# EAGLE board motherboard (EAGLE 5.06)
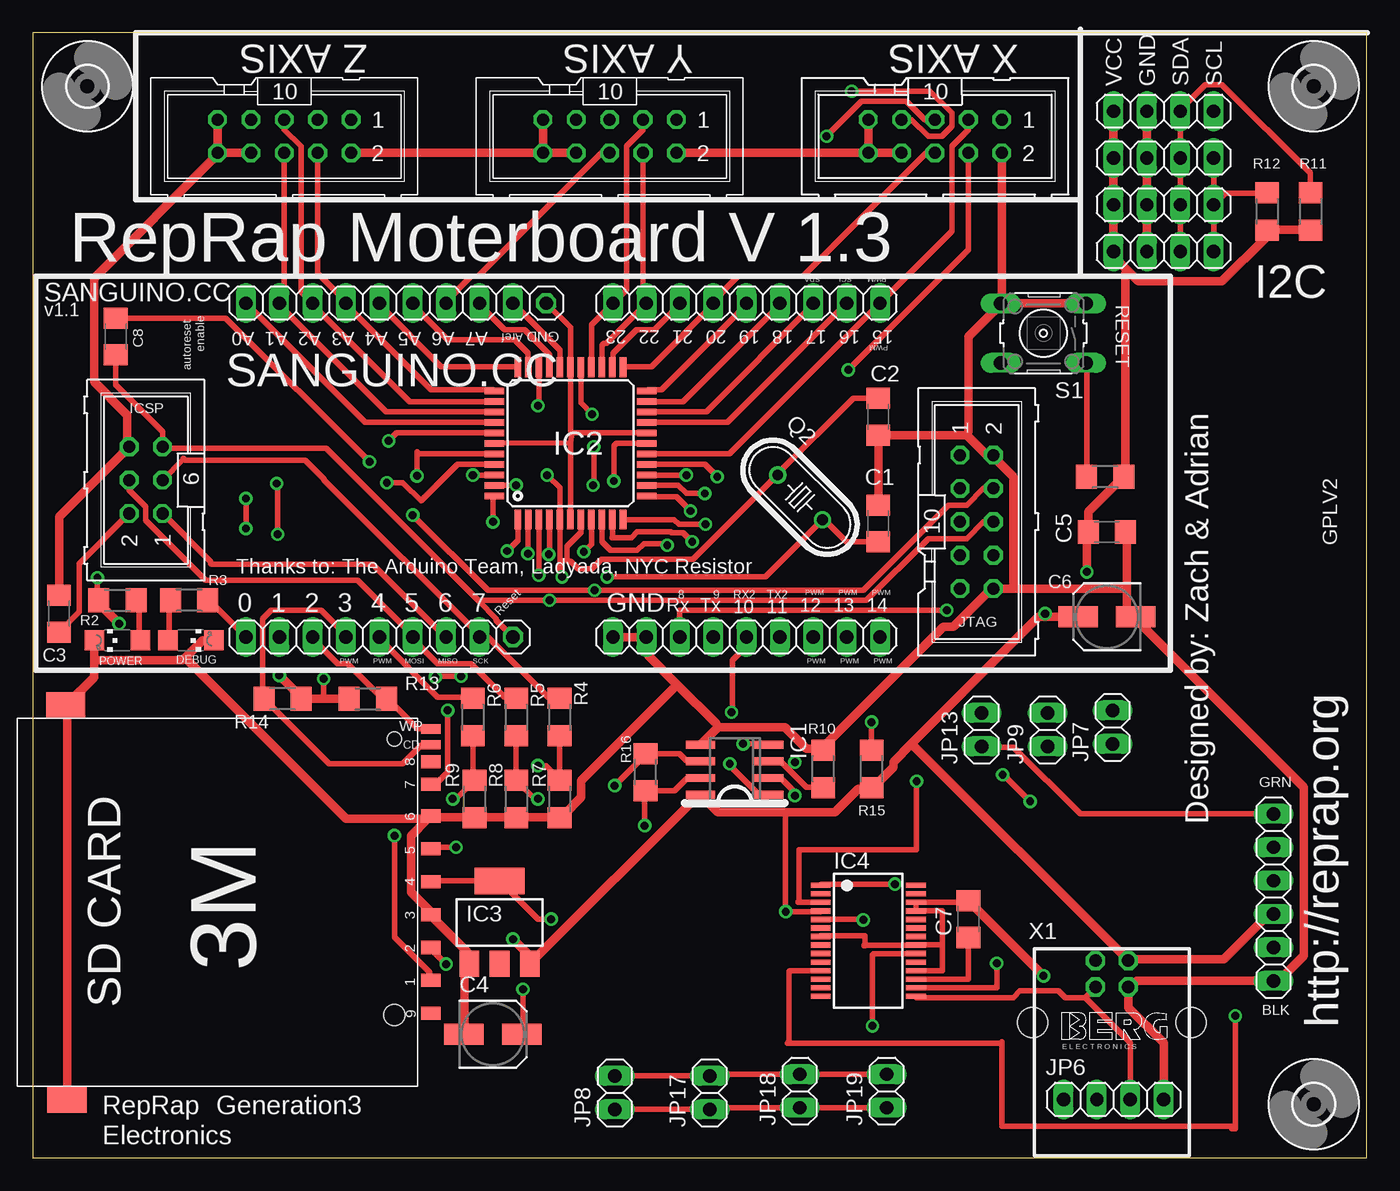
[diagram p0: board, top side]
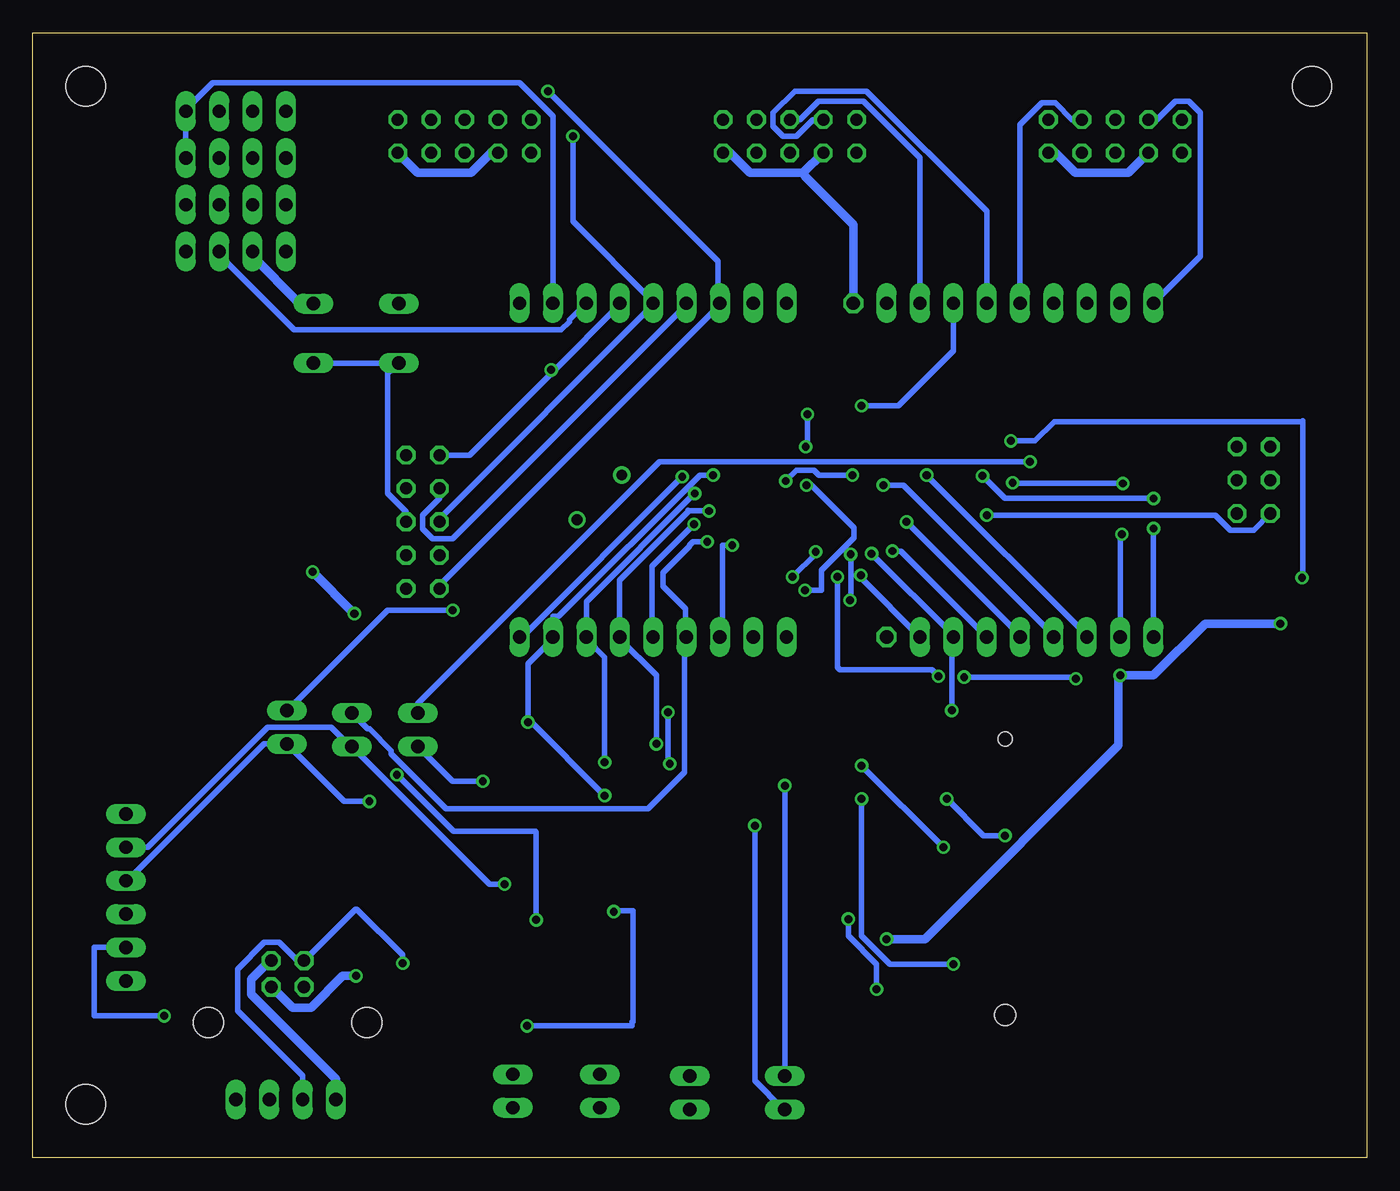
[diagram p1: board, bottom side, seen from below]

Size 101.52 x 85.59 mm. Coordinates in mm from the lower left corner, seen from the top.
Outline: 0,0 101.52,0 101.52,85.59 0,85.59 0,0
Copper layers (1*16): Top 0.035mm / dielectric 1.5mm / Bottom 0.035mm
Design rules "default *": minimum track width 10mil, minimum drill 24mil, track to track 8mil, track to pad 8mil, pad to pad 8mil, via to via 8mil, smd to smd 8mil, copper to edge 40mil, drill to drill 8mil, minimum pad ring 10mil, minimum via ring 8mil, stop-mask expansion 4mil, vias tented up to drill 0mil, thermal gap 10mil
Net classes: 0 default: width 0.406 mm, clearance 0.305 mm; 1 power: width 0.635 mm, clearance 0.406 mm

## Footprints (pad centres in the part's own frame; a part is rotated, then mirrored left to right if it is on the bottom)
C1206 = smd 1.6 x 1.8: 1 -1.4,0; 2 1.4,0
SANYO-OSCON_SMD_B6 = smd 3 x 1.6: + 2.2,0; - -2.2,0
CHIPLED_1206 = smd 1.5 x 1.5: A 0,-1.75; C 0,1.75
SO08 = smd 0.6 x 2.2: 1 -1.905,-2.6; 2 -0.635,-2.6; 3 0.635,-2.6; 4 1.905,-2.6; 5 1.905,2.6; 6 0.635,2.6; 7 -0.635,2.6; 8 -1.905,2.6
TQFP44 = smd 1.5 x 0.5: 1 -5.8,4; 2 -5.8,3.2; 3 -5.8,2.4; 4 -5.8,1.6; 5 -5.8,0.8; 6 -5.8,0; 7 -5.8,-0.8; 8 -5.8,-1.6; 9 -5.8,-2.4; 10 -5.8,-3.2; 11 -5.8,-4; 23 5.8,-4; 24 5.8,-3.2; 25 5.8,-2.4; 26 5.8,-1.6; 27 5.8,-0.8; 28 5.8,0; 29 5.8,0.8; 30 5.8,1.6; 31 5.8,2.4; 32 5.8,3.2; 33 5.8,4 | smd 0.5 x 1.5: 12 -4,-5.8; 13 -3.2,-5.8; 14 -2.4,-5.8; 15 -1.6,-5.8; 16 -0.8,-5.8; 17 0,-5.8; 18 0.8,-5.8; 19 1.6,-5.8; 20 2.4,-5.8; 21 3.2,-5.8; 22 4,-5.8; 34 4,5.8; 35 3.2,5.8; 36 2.4,5.8; 37 1.6,5.8; 38 0.8,5.8; 39 0,5.8; 40 -0.8,5.8; 41 -1.6,5.8; 42 -2.4,5.8; 43 -3.2,5.8; 44 -4,5.8
SOT223 = smd 1.5 x 2: 1 -2.3,-3.15; 2 0,-3.15; 3 2.3,-3.15 | smd 3.8 x 2: 4 0,3.15
SSOP28 = smd 0.4 x 1.5: 1 -4.225,-3.625; 2 -3.575,-3.625; 3 -2.925,-3.625; 4 -2.275,-3.625; 5 -1.625,-3.625; 6 -0.975,-3.625; 7 -0.325,-3.625; 8 0.325,-3.625; 9 0.975,-3.625; 10 1.625,-3.625; 11 2.275,-3.625; 12 2.925,-3.625; 13 3.575,-3.625; 14 4.225,-3.625; 15 4.225,3.625; 16 3.575,3.625; 17 2.925,3.625; 18 2.275,3.625; 19 1.625,3.625; 20 0.975,3.625; 21 0.325,3.625; 22 -0.325,3.625; 23 -0.975,3.625; 24 -1.625,3.625; 25 -2.275,3.625; 26 -2.925,3.625; 27 -3.575,3.625; 28 -4.225,3.625
1X09 = drill 1.016 long: 1 -10.16,0; 2 -7.62,0; 3 -5.08,0; 4 -2.54,0; 5 0,0; 6 2.54,0; 7 5.08,0; 8 7.62,0; 9 10.16,0
1X08 = drill 1.016 long: 1 -8.89,0; 2 -6.35,0; 3 -3.81,0; 4 -1.27,0; 5 1.27,0; 6 3.81,0; 7 6.35,0; 8 8.89,0
1X07 = drill 1.016 long: 1 -7.62,0; 2 -5.08,0; 3 -2.54,0; 4 0,0; 5 2.54,0; 6 5.08,0; 7 7.62,0
1X06 = drill 1.016 long: 1 -6.35,0; 2 -3.81,0; 3 -1.27,0; 4 1.27,0; 5 3.81,0; 6 6.35,0
1X04 = drill 1.016 long: 1 -3.81,0; 2 -1.27,0; 3 1.27,0; 4 3.81,0
1X02 = drill 1.016 long: 1 -1.27,0; 2 1.27,0
1X01 = drill 1.016 octagon: 1 0,0
HC49U-V = drill 0.813 round: 1 -2.413,0; 2 2.413,0
R1206 = smd 1.6 x 1.803: 1 -1.422,0; 2 1.422,0
B3F-10XX = drill 1.016 long: 1 -3.251,2.261; 2 3.251,2.261; 3 -3.251,-2.261; 4 3.251,-2.261
ML6 = drill 0.914 octagon: 1 -2.54,-1.27; 2 -2.54,1.27; 3 0,-1.27; 4 0,1.27; 5 2.54,-1.27; 6 2.54,1.27
ML10 = drill 0.914 octagon: 1 -5.08,-1.27; 2 -5.08,1.27; 3 -2.54,-1.27; 4 -2.54,1.27; 5 0,-1.27; 6 0,1.27; 7 2.54,-1.27; 8 2.54,1.27; 9 5.08,-1.27; 10 5.08,1.27
3,0 = hole 3: 0,0
3M-SDCARD = smd 1 x 1.5: 1 5.93,16.5; 2 3.43,16.5; 3 0.93,16.5; 4 -1.57,16.5; 5 -4.07,16.5; 6 -6.57,16.5; 7 -9,16.5; 8 -10.7,16.5; 9 8.43,16.5 | smd 0.7 x 1.5: CD -12,16.5; WP -13.2,16.5 | smd 2 x 3: GND1 -15,-11.3; GND2 15,-11.2 | hole 1.1: -12.427,13.705 | hole 1.6: 8.567,13.708
PN61729 = drill 0.95 octagon: 1 1.25,4.71; 2 -1.25,4.71; 3 -1.25,2.71; 4 1.25,2.71 | hole 2.3: -6.02,0; 6.02,0

## Placement (x,y rotation side)
C1  22pf  [C1206]  64.35,48.26 270 top
C2  22pf  [C1206]  64.35,56.38 90 top
C3  100nF  [C1206]  1.99,41.4 90 top
C4  100uF  [SANYO-OSCON_SMD_B6]  35.01,9.39 0 top
C5  100nF  [C1206]  81.75,47.62 0 top
C6  100uF  [SANYO-OSCON_SMD_B6]  81.75,41.14 180 top
C7  100nF  [C1206]  71.21,18.16 90 top
C8  100nF  [C1206]  6.31,62.48 270 top
DEBUG  [CHIPLED_1206]  12.03,39.37 270 top
IC1  SN75176ASOIC  [SO08]  53.43,29.52 90 top
IC2  ATMEGA644A  [TQFP44]  40.92,54.35 90 top
IC3  LD117AS33TR  [SOT223]  35.52,17.9 0 top
IC4  FT232RL  [SSOP28]  63.59,16.5 270 top
JP1  [1X09]  26.38,65.02 0 top
JP2  [1X08]  25.11,39.62 0 top
JP3  [1X09]  54.32,65.02 180 top
JP4  [1X07]  56.86,39.62 180 top
JP5  [1X06]  94.45,19.81 90 top
JP6  [1X04]  82.26,4.44 0 top
JP7  [1X02]  82.19,32.76 90 top
JP8  [1X02]  44.29,4.95 90 top
JP9  [1X02]  77.24,32.57 90 top
JP10  [1X01]  36.54,39.62 0 top
JP11  [1X02]  45.43,39.62 180 top
JP12  [1X01]  39.08,65.02 0 top
JP13  [1X02]  72.23,32.57 90 top
JP14  [1X04]  86.07,72.51 0 top
JP15  [1X04]  86.07,76.07 0 top
JP16  [1X04]  86.07,79.62 0 top
JP17  [1X02]  51.52,4.95 90 top
JP18  [1X02]  58.38,5.07 90 top
JP19  [1X02]  64.99,5.07 90 top
JP20  [1X04]  86.07,68.96 0 top
POWER  [CHIPLED_1206]  6.44,39.37 90 top
Q2  16Mhz  [HC49U-V]  58.4,50.25 135 top
R1  10k  [R1206]  81.62,51.81 0 top
R2  1K  [R1206]  6.44,42.41 180 top
R3  1K  [R1206]  11.9,42.41 0 top
R4  1.8K  [R1206]  40.09,33.52 90 top
R5  1.8K  [R1206]  36.79,33.52 90 top
R6  1.8K  [R1206]  33.49,33.52 90 top
R7  3.3K  [R1206]  40.09,27.3 90 top
R8  3.3K  [R1206]  36.79,27.3 90 top
R9  3.3K  [R1206]  33.62,27.3 90 top
R10  4.7K  [R1206]  60.16,29.59 270 top
R11  1.8K  [R1206]  97.24,72 90 top
R12  1.8K  [R1206]  93.94,72 90 top
R13  10K  [R1206]  25.49,34.92 180 top
R14  10K  [R1206]  19.01,34.92 0 top
R15  4.7K  [R1206]  63.84,29.59 270 top
R16  180  [R1206]  46.63,29.33 270 top
S1  [B3F-10XX]  76.92,62.73 180 top
SV1  [ML6]  8.6,51.56 90 top
SV2  [ML10]  71.84,48.38 270 top
SV3  [ML10]  68.67,77.72 180 top
SV4  [ML10]  43.9,77.72 180 top
SV5  [ML10]  19.14,77.72 180 top
U$3  [3,0]  4.15,81.53 0 top
U$4  [3,0]  97.5,81.53 0 top
U$5  [3,0]  97.5,4.06 0 top
U$8  SDCARD  [3M-SDCARD]  13.81,19.43 270 top
X1  [PN61729]  82.13,10.28 0 top

## Library data of the parts
C1-C8 R1 R2 R10-R16 = rcl
DEBUG POWER = led
IC1 U$8 = reprap
IC2 = atmel
IC3 = v-reg
IC4 = ftdichip
JP1-JP20 = pinhead
Q2 = SparkFun
R3-R9 = resistor
S1 = switch-omron
SV1-SV3 = con-harting-ml
SV4 SV5 = con-ml
U$3-U$5 = holes
X1 = con-berg

## Nets
3V3: C4.+ IC3.4 U$8.4
5VSB: C3.1 IC2.27 SV1.2 SV2.4
A0: IC2.37 JP1.1 SV5.7
A1: IC2.36 JP1.2 SV5.6
A2: IC2.35 JP1.3 SV5.5
A3: IC2.34 JP1.4 SV5.4
A4: IC2.33 JP1.5 SV5.3
A5: IC2.32 JP1.6 SV4.7
A6: IC2.31 JP1.7 SV4.6
A7: IC2.30 JP1.8 SV4.5
AREF: IC2.29 JP1.9
D0: IC2.40 JP2.1 R3.2
D1: IC2.41 JP2.2
D3: IC2.43 JP2.4 R14.1 U$8.CD
D12: IC1.3 IC2.13 JP4.3 R10.2
D13: IC1.2 IC2.14 JP4.2 R15.1
D14: IC2.15 JP4.1
D15: IC2.16 JP3.1 SV3.3
D18: IC2.21 JP3.4 SV2.1 SV3.4
D19: IC2.22 JP3.5 SV2.5 SV3.5
D20: IC2.23 JP3.6 SV2.3 SV3.6
D21: IC2.24 JP3.7 SV2.9 SV3.7
D22: IC2.25 JP3.8 SV4.4
D23: IC2.26 JP3.9 SV4.3
GND [power]: C1.1 C2.1 C3.2 C4.- C5.2 C6.- C7.2 DEBUG.C IC1.5 IC2.6 IC2.18 IC2.28 IC2.39 IC3.1 IC4.7 IC4.18 IC4.21 IC4.25 IC4.26 JP5.1 JP6.4 JP11.1 JP11.2 JP12.1 JP14.2 JP15.2 JP16.2 JP20.2 POWER.C R7.1 R8.1 R9.1 R10.1 S1.3 S1.4 SV1.6 SV2.2 SV2.10 SV3.2 SV3.8 SV3.9 SV3.10 SV4.2 SV4.8 SV4.9 SV4.10 SV5.2 SV5.8 SV5.9 SV5.10 U$8.3 U$8.6 U$8.GND1 U$8.GND2 X1.4
INT0: IC1.1 IC2.11 JP4.5
INT1: IC1.4 IC2.12 JP4.4
INT2: IC2.42 JP2.3 R13.1 U$8.WP
MISO: IC2.2 JP2.7 SV1.1 U$8.7
MOSI: IC2.1 JP2.6 R5.2 SV1.4
N$1: C2.2 IC2.7 Q2.2
N$2: IC4.11 JP5.2
N$3: IC4.15 JP6.3 X1.3
N$4: POWER.A R2.1
N$5: IC4.16 JP6.2 X1.2
N$6: C7.1 IC4.17
N$7: DEBUG.A R3.1
N$8: C1.2 IC2.8 Q2.1
N$14: R6.1 R9.2 U$8.1
N$17: R5.1 R8.2 U$8.2
N$23: R4.1 R7.2 U$8.5
RESET: C8.2 IC2.4 JP10.1 R1.1 S1.1 S1.2 SV1.5 SV2.6
RS485A: IC1.6 JP8.2 JP17.2 JP18.2 JP19.2 R16.1
RS485B: IC1.7 JP8.1 JP17.1 JP18.1 JP19.1 R16.2
RTS#: C8.1 JP13.2
RTS##: IC4.3 JP5.6 JP13.1
RXD: IC2.9 JP4.7 JP7.2
RXD#: IC4.5 JP5.4 JP7.1
SCK: IC2.3 JP2.8 R4.2 SV1.3
SCL: IC2.19 JP3.2 JP14.4 JP15.4 JP16.4 JP20.4 R12.2
SDA: IC2.20 JP3.3 JP14.3 JP15.3 JP16.3 JP20.3 R11.2
SS: IC2.44 JP2.5 R6.2
TXD: IC2.10 JP4.6 JP9.2
TXD#: IC4.1 JP5.5 JP9.1
VCC [power]: C5.1 C6.+ IC1.8 IC2.5 IC2.17 IC2.38 IC3.3 IC4.4 IC4.20 JP5.3 JP6.1 JP14.1 JP15.1 JP16.1 JP20.1 R1.2 R2.2 R11.1 R12.1 R13.2 R14.2 R15.2 X1.1

## Tracks (layer width: path | path; a pad name or v marks a point on that pad's centre or on a via)
3V3  (via drill 0.61)
  Top 0.406: U$8.4 30.31,21.08 35.52,21.08 IC3.4 35.65,20.95 38.44,18.16 v39.46,18.16 | v37.3,12.82 37.3,9.39 C4.+
  Bottom 0.406: v37.3,12.82 37.3,14.73 39.46,16.89 v39.46,18.16
5VSB  (via drill 0.6, 0.61)
  Top 0.406: SV1.2 3.52,45.21 3.52,41.52 C3.1 | SV2.4 72.35,50.92 71.08,49.65 69.69,49.65 63.21,43.18 v42.76,43.18 34.63,43.18 v28.92,48.89 | IC2.27 41.72,57.42 v42.57,56.57 | v42.7,54.1 42.7,51.24 v42.63,51.18
  Bottom 0.406: v28.92,48.89 11.52,48.89 10.38,47.75 8.6,47.75 SV1.2 | v42.57,56.57 42.57,54.22 v42.7,54.1 | 42.63,43.37 42.82,43.18 v42.76,43.18 41.49,43.18 41.49,44.7 39.02,47.18 39.02,47.94 42.25,51.18 v42.63,51.18
A0
  Top 0.406: IC2.37 25.29,55.95 JP1.1
  Bottom 0.406: SV5.7 15.96,78.99 14.57,80.39 13.55,80.39 12.66,79.5 12.66,68.57 JP1.1
A1
  Top 0.406: IC2.36 35.01,56.76 26.89,56.76 18.76,64.89 JP1.2 19.14,64.77 SV5.6
A2
  Top 0.406: IC2.35 35.01,57.53 28.66,57.53 21.3,64.89 JP1.3 20.41,65.91 20.41,76.96 19.14,78.23 SV5.5
A3
  Top 0.406: IC2.34 35.01,58.41 30.31,58.41 23.84,64.89 JP1.4 23.84,65.15 21.68,67.3 SV5.4
A4
  Top 0.406: JP1.5 26.38,64.89 31.08,60.19 36.92,60.19 IC2.33
  Bottom 0.406: SV5.3 22.44,78.99 23.71,80.26 24.73,80.26 26.38,78.61 JP1.5
A5
  Top 0.406: JP1.6 28.92,64.89 31.58,62.23 36.66,62.23 37.68,61.21 37.68,60.19 IC2.32
  Bottom 0.406: SV4.7 42.13,78.99 43.4,77.72 44.41,77.72 45.17,78.48 45.17,79.5 43.52,81.15 38.06,81.15 28.92,72 JP1.6
A6  (via drill 0.6)
  Top 0.406: SV4.6 43.27,76.45 33.87,67.05 33.36,67.05 31.46,65.15 JP1.7 | IC2.31 38.52,57.29 v38.44,57.21
  Bottom 0.406: v38.44,57.21 35.65,57.21 31.46,61.4 JP1.7
A7
  Top 0.406: JP1.8 34,64.89 35.9,62.99 37.43,62.99 39.33,61.08 39.33,60.19 IC2.30
  Bottom 0.406: SV4.5 43.14,78.99 41.75,80.39 38.32,80.39 34,76.07 JP1.8
AREF
  Top 0.406: IC2.29 40.12,61.44 JP1.9
D0  (via drill 0.6)
  Top 0.406: JP2.1 13.42,42.41 R3.2 | v16.22,47.87 v16.22,50.16 | IC2.40 29.4,53.55 arc-90 29.23,53.72 v29.23,51.88
  Bottom 0.406: JP2.1 v16.22,47.87 | v16.22,50.16 27.52,50.16 v29.23,51.88
D1  (via drill 0.6)
  Top 0.406: v18.63,47.43 18.63,51.24 v18.57,51.3 | v26.95,51.37 28.16,51.37 29.55,49.97 32.35,52.76 35.11,52.76 IC2.41
  Bottom 0.406: JP2.2 18.76,47.3 v18.63,47.43 | v18.57,51.3 26.89,51.3 v26.95,51.37
D3  (via drill 0.61)
  Top 0.406: U$8.CD 30.19,31.36 29.55,31.36 28.16,29.97 22.57,29.97 17.61,34.92 R14.1 17.49,35.05 17.49,41.02 18.12,41.65 21.93,41.65 23.84,39.75 JP2.4 | v36.79,51.18 35.14,51.18 IC2.43
  Bottom 0.406: v36.79,51.18 35.27,51.18 23.84,39.75 JP2.4
D12  (via drill 0.6, 0.61)
  Top 0.406: 57.49,29.59 56.98,30.09 56.1,30.09 IC1.3 | 57.49,29.59 58.89,28.19 60.16,28.19 R10.2 | IC2.13 46.83,51.18 49.11,51.18 49.75,50.54 v51.14,50.54 | 57.49,29.59 v58,30.09
  Bottom 0.406: v58,30.09 58,38.09 59.4,39.49 JP4.3 59.4,42.29 v51.14,50.54
D13  (via drill 0.61)
  Top 0.406: v49.75,51.94 46.83,51.94 IC2.14 | v63.84,33.14 R15.1 | v58,27.55 58,27.81 56.98,28.82 56.1,28.82 IC1.2
  Bottom 0.406: v58,27.55 63.72,33.27 v63.84,33.14 63.84,37.59 61.94,39.49 JP4.2 61.94,41.21 61.49,41.21 50.76,51.94 v49.75,51.94
D14  (via drill 0.6)
  Top 0.406: IC2.15 51.16,52.75 v52.09,51.81
  Bottom 0.406: 52.29,51.81 v52.09,51.81 64.29,39.62 JP4.1
D15
  Top 0.406: SV3.3 71.21,78.23 69.94,76.96 69.94,70.48 JP3.1 53.01,53.55 IC2.16
D18  (via drill 0.61)
  Top 0.406: JP3.4 56.86,64.89 49.49,57.53 46.83,57.53 IC2.21 | SV3.4 71.21,69.08 v62.07,59.94
  Bottom 0.406: SV2.1 68.29,53.46 61.94,59.81 | 61.94,59.81 56.86,64.89 JP3.4 | 61.94,59.81 v62.07,59.94
D19  (via drill 0.61)
  Top 0.406: JP3.5 54.32,64.89 47.84,58.41 46.83,58.41 IC2.22 | SV3.5 67.91,78.99 66.51,80.39 63.08,80.39 v60.41,77.72
  Bottom 0.406: SV2.5 70.57,48.64 54.32,64.89 JP3.5 54.32,65.15 60.41,71.24 v60.41,77.72
D20
  Top 0.406: IC2.23 44.92,60.19 47.08,60.19 51.78,64.89 JP3.6 51.78,65.15 53.68,67.05 58.64,67.05 68.03,76.45 SV3.6
  Bottom 0.406: SV2.3 70.57,50.16 71.84,48.89 71.84,47.87 71.08,47.11 69.56,47.11 51.78,64.89 JP3.6
D21  (via drill 0.61)
  Top 0.406: JP3.7 49.24,64.89 47.33,62.99 45.94,62.99 44.16,61.21 44.16,60.19 IC2.24 | SV3.7 66.89,78.99 68.16,77.72 69.18,77.72 69.94,78.48 69.94,79.5 68.29,81.15 v62.32,81.15
  Bottom 0.406: SV2.9 70.57,43.56 49.24,64.89 JP3.7 49.37,65.15 49.37,68.19 v62.32,81.15
D22
  Top 0.406: SV4.4 46.44,65.27 JP3.8 43.65,61.97 43.46,61.97 43.32,61.83 IC2.25
D23
  Top 0.406: IC2.26 42.51,60.19 42.51,63.37 JP3.9 45.17,66.03 45.17,76.96 46.44,78.23 SV4.3
GND  (via drill 0.61)
  Top 0.406: C7.2 71.21,19.43 IC4.26 IC4.25 69.24,18.78 69.24,16.19 | 69.24,16.19 IC4.21 63.27,16.18 63.27,16.12 63.34,16.12 63.34,16.89 59.96,16.89 IC4.7 | IC4.18 69.24,14.23 69.24,16.19 | JP12.1 40.92,63.18 IC2.28 40.92,55.3 41.05,55.18 | 41.05,55.18 46.69,55.18 IC2.18 | 40.92,54.41 IC2.39 | 41.05,55.18 40.92,54.41 | 40.92,54.41 IC2.6
  Top 0.635: 4.66,37.84 4.66,36.57 2.63,34.54 U$8.GND1 2.63,34.16 2.63,4.44 U$8.GND2 | 4.66,37.84 4.66,39.37 POWER.C | 11.58,38.03 11.39,37.84 4.66,37.84 | 11.58,38.03 12.92,39.37 DEBUG.C | JP11.2 JP11.1 46.83,39.37 46.83,38.22 49.05,36 | 52.16,32.76 57.24,32.76 58.89,31.11 60.16,31.11 R10.1 60.29,31.36 69.3,40.38 70.07,40.38 72.86,43.18 SV2.10 74.64,43.3 | 52.16,32.76 50.89,31.49 IC1.5 | 49.05,36 52.03,33.02 52.16,32.76 | U$8.6 30.31,25.9 33.62,25.9 R9.1 33.87,25.9 36.79,25.9 R8.1 37.05,25.9 40.09,25.9 R7.1 40.35,26.03 41.75,27.43 41.75,28.7 49.05,36 | C4.- 32.86,9.39 32.86,14.73 IC3.1 33.11,14.85 33.11,15.62 30.31,18.41 U$8.3 30.19,18.79 28.79,20.19 28.79,24.51 30.06,25.78 U$8.6 | 11.58,38.03 23.84,25.78 29.68,25.78 U$8.6 | C3.2 1.99,48.76 SV1.6 7.2,54.35 7.2,56.51 4.66,59.05 4.66,66.92 13.93,76.19 SV5.10 | SV5.10 SV5.9 | SV5.8 SV5.10 | SV4.10 SV4.9 | SV4.8 SV4.10 | SV4.10 SV5.2 | v76.92,13.84 C7.2 | JP6.4 86.07,8.76 83.4,11.43 83.4,12.95 X1.4 83.66,13.08 84.04,13.46 JP5.1 94.7,13.58 94.96,13.58 96.74,15.36 96.74,28.19 84.04,40.89 C6.- 83.91,41.14 83.27,41.78 83.27,43.3 | 83.27,43.3 83.27,47.62 C5.2 | 74.64,43.3 83.27,43.3 | C1.1 C2.1 64.61,54.99 71.08,54.99 | 71.08,54.99 72.61,53.46 SV2.2 73.24,53.21 74.64,51.81 74.64,43.3 | JP20.2 JP14.2 JP15.2 JP16.2 | SV3.10 SV3.9 | SV3.8 SV3.10 | SV3.2 73.75,65.02 S1.4 | S1.3 80.1,65.02 74,65.02 S1.4 | 71.08,54.99 71.21,55.24 71.21,62.48 73.5,64.77 S1.4 | SV3.10 SV4.2
  Bottom 0.635: SV5.2 23.71,76.45 22.19,74.92 18.12,74.92 SV5.8 | SV4.2 48.48,76.45 46.95,74.92 42.89,74.92 | 42.89,74.92 SV4.8 | JP12.1 39.08,70.99 42.76,74.67 42.89,74.92 | v76.92,13.84 77.94,13.84 80.35,11.43 81.75,11.43 83.27,12.95 X1.4 | SV3.8 66.64,76.45 68.16,74.92 72.23,74.92 SV3.2 | JP20.2 84.8,68.57 81.24,65.02 80.23,65.02 S1.3
INT0  (via drill 0.6)
  Top 0.406: JP4.5 54.32,38.92 53.24,37.84 53.24,33.97 v53.18,33.9 | v53.05,29.97 53.05,29.84 55.53,27.36 55.78,27.36 IC1.1 | IC2.11 48.82,48.55 49.17,48.19 v51.21,48.19
  Bottom 0.406: v53.18,33.9 53.18,30.09 v53.05,29.97 | v51.21,48.19 54.38,45.02 54.38,39.68 JP4.5
INT1  (via drill 0.6, 0.61)
  Top 0.406: IC2.12 46.83,50.29 48.98,50.29 v50.06,49.21 | v54.06,31.49 55.97,31.49 IC1.4
  Bottom 0.406: v54.06,31.49 54.06,36.7 56.86,39.49 JP4.4 56.86,43.94 51.65,49.14 51.65,49.27 51.59,49.21 v50.06,49.21
INT2  (via drill 0.61)
  Top 0.406: U$8.WP 30.19,32.63 29.3,32.63 27.01,34.92 R13.1 26.76,35.05 26.5,35.05 23.96,37.59 23.2,37.59 21.3,39.49 JP2.3 | v33.49,51.94 35.01,51.94 IC2.42
  Bottom 0.406: v33.49,51.94 21.3,39.75 JP2.3
MISO  (via drill 0.61)
  Top 0.406: v31.58,34.03 31.58,29.33 30.7,28.44 30.31,28.44 U$8.7 | v37.68,45.97 37.68,48.51 IC2.2 | JP2.7 31.46,39.75 31.27,39.75 25.87,45.14 13.62,45.14 13.55,45.21 13.55,45.33 SV1.1
  Bottom 0.406: v31.58,34.03 31.58,39.49 JP2.7 31.46,39.75 v37.68,45.97
MOSI  (via drill 0.6)
  Top 0.406: R5.2 36.79,35.05 35.9,35.05 33.36,37.59 30.82,37.59 28.92,39.49 JP2.6 28.92,39.75 24.73,43.94 13.17,43.94 8.6,48.51 8.6,49.53 7.33,50.8 SV1.4 | IC2.1 36.92,46.98 v36.09,46.16
  Bottom 0.406: v36.09,46.16 35.46,46.16 JP2.6
N$1
  Top 0.406: C2.2 62.45,57.78 56.73,52.07 Q2.2 50.26,45.53 43.27,45.53 42.57,44.83 41.49,44.83 40.92,45.4 40.73,45.4 40.66,45.46 40.66,46.54 41.72,47.59 IC2.7
N$2  (via drill 0.6)
  Top 0.406: IC4.11 57.63,14.23 57.56,14.16 57.56,8.82 57.43,8.69 73.62,8.69 73.75,8.82 73.75,2.41 91.28,2.41 91.28,2.22 91.53,2.22 v91.53,10.79
  Bottom 0.406: v91.53,10.79 96.86,10.79 96.86,16 JP5.2
N$3
  Top 0.406: 80.1,12.19 78.58,12.19 78.07,12.7 75.15,12.7 74.64,12.19 67.27,12.19 IC4.15 | 80.1,12.19 80.86,12.95 X1.3 | JP6.3 83.53,8.76 80.1,12.19
N$4
  Top 0.406: POWER.A 8.09,39.37 8.09,42.29 7.96,42.41 R2.1
N$5  (via drill 0.6)
  Top 0.406: IC4.16 73.37,12.93 v73.37,14.79
  Bottom 0.406: JP6.2 80.99,6.22 85.94,11.17 85.94,14.35 83.91,16.38 82.77,16.38 81.5,15.11 80.99,15.11 X1.2 76.95,18.92 76.86,18.92 73.37,15.43 v73.37,14.79
N$6
  Top 0.406: IC4.17 71.21,13.58 C7.1
N$7
  Top 0.406: DEBUG.A 10.38,39.37 10.38,42.41 R3.1
N$8  (via drill 0.6)
  Top 0.406: IC2.8 42.51,48.51 | Q2.1 60.03,48.51 | C1.2 61.94,46.86 60.29,48.51 Q2.1 | IC2.8 42.51,48.38 | IC2.8 42.52,46.68 v41.94,46.1 | v43.71,44.19 55.75,44.19 Q2.1
  Bottom 0.406: v41.94,46.1 41.94,45.97 v43.71,44.19
N$14  (via drill 0.61)
  Top 0.406: v27.52,24.51 27.52,16.76 30.19,14.09 30.19,13.58 U$8.1 | v31.97,27.3 32.22,27.3 33.62,28.7 R9.2 33.49,28.82 R6.1
  Bottom 0.406: v27.52,24.51 29.17,24.51 v31.97,27.3
N$17  (via drill 0.61)
  Top 0.406: v31.46,14.73 30.31,15.87 U$8.2 | v38.44,27.3 38.19,27.3 36.79,28.7 R8.2 R5.1
  Bottom 0.406: v31.46,14.73 36.28,14.73 38.44,16.89 v38.44,27.3
N$23  (via drill 0.61)
  Top 0.406: v32.22,23.62 30.31,23.62 U$8.5 | v38.44,29.84 39.08,29.84 40.09,28.82 R7.2 R4.1
  Bottom 0.406: v32.22,23.62 v38.44,29.84
RESET  (via drill 0.6)
  Top 0.406: R1.1 80.23,51.81 80.23,60.45 S1.1 | C8.2 6.31,58.8 9.87,55.24 SV1.5 10,53.97 22.31,53.97 34,42.29 | JP10.1 35.27,40.89 35.27,41.02 34,42.29 | SV2.6 72.35,48.38 71.08,47.11 68.16,47.11 63.46,42.41 v39.33,42.41 34.12,42.41 34,42.29 | IC2.4 39.32,45.96 v39.27,45.91
  Bottom 0.406: SV2.6 73.11,49.14 74.51,50.54 74.51,59.69 73.75,60.45 S1.2 74,60.45 80.1,60.45 S1.1 | v39.27,45.91 39.27,42.48 v39.33,42.41
RS485A  (via drill 0.61)
  Top 0.406: JP19.2 JP18.2 51.65,6.34 JP17.2 JP8.2 | IC1.6 50.76,30.22 49.75,30.22 49.24,30.73 46.7,30.73 R16.1 46.57,30.6 v44.29,28.32
  Bottom 0.406: JP8.2 v44.29,28.32
RS485B  (via drill 0.61)
  Top 0.406: JP19.1 JP18.1 51.65,3.81 JP17.1 JP8.1 | IC1.7 50.76,28.82 49.75,28.82 48.86,27.93 46.7,27.93 R16.2 46.57,27.81 v46.57,25.27
  Bottom 0.406: v46.57,25.27 46.57,5.84 44.41,3.68 JP8.1
RTS#  (via drill 0.61)
  Top 0.406: v25.62,52.95 14.69,63.88 C8.1
  Bottom 0.406: v25.62,52.95 53.81,52.95 72.23,34.54 JP13.2
RTS##  (via drill 0.6)
  Top 0.406: JP5.6 79.72,26.16 74.64,31.24 72.23,31.24 JP13.1 | IC4.3 58.26,19.43 58.26,19.49 58.32,19.49 58.32,23.43 67.27,23.43 v67.27,28.63
  Bottom 0.406: v67.27,28.63 69.56,28.63 JP13.1
RXD  (via drill 0.6, 0.61)
  Top 0.406: v69.56,41.65 49.24,41.65 JP4.7 | IC2.9 43.32,46.87 43.97,46.22 46,46.22 46.51,46.73 48.22,46.73 48.29,46.67 v48.29,46.6
  Bottom 0.406: v69.56,41.65 74.51,41.65 82.13,34.03 JP7.2 | v48.29,46.6 49.05,46.6 49.05,39.81 JP4.7
RXD#  (via drill 0.6)
  Top 0.406: IC4.5 63.17,18.13 v63.21,18.09 | v73.81,29.14 73.88,29.14 v75.91,27.11
  Bottom 0.406: JP5.4 94.32,21.08 83.91,31.49 JP7.1 77.81,27.11 v75.91,27.11 | v63.21,18.09 63.21,24.76 63.27,24.82 69.49,24.82 v73.81,29.14
SCK  (via drill 0.6)
  Top 0.406: R4.2 40.09,35.05 39.21,35.05 34.63,39.62 JP2.8 34,39.75 22.19,51.56 22.19,51.62 20.73,53.08 11.58,53.08 11.46,53.21 11.46,53.14 SV1.3 | IC2.3 38.52,44.33 v38.51,44.32
  Bottom 0.406: v38.51,44.32 38.51,44.13 JP2.8
SCL
  Top 0.406: JP14.4 90.77,73.4 93.94,73.4 R12.2 | JP14.4 JP20.4 | JP15.4 JP14.4 | IC2.19 52.87,55.95 JP3.2
  Bottom 0.406: JP3.2 61.94,79.24 64.48,81.78 87.85,81.78 89.88,79.75 JP16.4 JP15.4
SDA
  Top 0.406: JP3.3 59.4,64.89 51.27,56.76 46.83,56.76 IC2.20 | JP20.3 JP14.3 JP15.3 JP16.3 87.34,79.75 89.24,81.66 90.51,81.66 97.24,74.92 R11.2
  Bottom 0.406: JP3.3 60.67,63.75 60.67,63.62 61.3,62.99 81.62,62.99 87.34,68.7 JP20.3
SS  (via drill 0.61)
  Top 0.406: v35.01,48.38 35.01,50.29 IC2.44 | JP2.5 26.38,39.49 30.82,35.05 33.49,35.05 R6.2
  Bottom 0.406: v35.01,48.38 26.38,39.75 JP2.5
TXD  (via drill 0.6)
  Top 0.406: IC2.10 44.12,47.2 44.09,47.18 45.55,47.18 46,47.62 48.54,47.62 48.6,47.56 49.49,47.56 v50.19,46.86
  Bottom 0.406: JP9.2 76.03,32.63 75.91,32.63 74.26,30.98 74.26,30.73 70.07,26.54 54.7,26.54 51.91,29.33 51.91,39.49 JP4.6 51.84,39.68 51.84,41.78 53.56,43.49 53.56,44.51 51.52,46.54 51.52,46.6 51.27,46.86 v50.19,46.86
TXD#  (via drill 0.61)
  Top 0.406: v65.62,20.82 60.03,20.82 IC4.1
  Bottom 0.406: v65.62,20.82 66.76,20.82 JP9.1 77.43,31.36 78.83,32.76 83.66,32.76 92.8,23.62 JP5.5
VCC  (via drill 0.6, 0.61)
  Top 0.406: 61.05,26.28 57.3,26.28 v57.3,18.73 59.96,18.73 IC4.4 | IC4.20 63.97,15.53 63.97,15.43 63.91,15.43 v63.91,10.03 | IC2.38 27.69,55.15 v27.08,54.54 | v4.92,44.13 4.92,42.52 R2.2 | v40.28,44.19 40.12,44.36 IC2.5 40.12,50.96 v39.14,51.94 | v32.6,36.64 30.7,36.64 v30.63,36.57 | v22.12,36.44 22.12,35.17 21.87,34.92 | v44.22,51.49 44.22,54.16 44.41,54.35 IC2.17
  Top 0.635: R11.1 97.24,70.61 93.94,70.61 R12.1 93.81,70.35 93.81,69.97 90.51,66.67 84.16,66.67 83.34,67.49 | 83.34,67.49 82.26,68.57 JP20.1 JP14.1 JP15.1 JP16.1 | 83.34,67.49 83.15,67.3 83.15,52.07 R1.2 83.02,51.81 80.35,49.14 C5.1 80.23,47.37 v80.23,44.57 | JP5.3 94.07,18.54 90.64,15.11 83.4,15.11 X1.1 83.15,15.24 66.89,31.49 | R13.2 21.87,34.92 R14.2 20.28,35.17 v18.76,36.7 | v6.57,40.64 5.04,42.16 5.04,42.41 R2.2 | 77.05,41.14 76.54,41.14 66.89,31.49 | 66.89,31.49 65.49,30.09 65.49,29.71 64.1,28.32 R15.2 63.84,28.06 62.83,28.06 61.05,26.28 52.16,26.28 50.89,27.55 IC1.8 50.64,27.55 37.94,14.85 IC3.3 37.94,15.24 v36.54,16.63 | 77.05,41.14 C6.+ | 77.05,41.14 v77.05,41.4
  Bottom 0.406: v63.91,10.03 55.91,10.03 55.91,10.35 55.84,10.35 55.84,18.79 57.3,18.79 v57.3,18.73 | v27.08,54.54 25.23,54.54 23.77,56 4.92,56 4.85,56.07 4.85,44.19 v4.92,44.13 | v40.28,44.19 40.28,37.33 40.09,37.14 33.11,37.14 v32.6,36.64 | v30.63,36.57 22.25,36.57 v22.12,36.44 | v39.14,51.94 41.68,51.94 42.06,52.32 43.4,52.32 v44.22,51.49
  Bottom 0.635: JP6.1 78.45,5.96 84.92,12.44 84.92,13.58 83.4,15.11 X1.1 | v6.57,40.64 12.28,40.64 16.22,36.7 v18.76,36.7 18.88,36.44 18.88,31.36 33.62,16.63 v36.54,16.63 | v77.05,41.4 v80.23,44.57

## Text on the board
tPlace: Z AXIS | Y AXIS | X AXIS | VCC | GND | SDA | SCL | RepRap Moterboard V 1.3 | I2C | SDA | SCL | PWM | SANGUINO.CC | RESET | v1.1 | A0 | A1 | A2 | A3 | A4 | A5 | A6 | A7 | GND | 23 | 22 | 21 | 20 | 19 | 18 | 17 | 16 | 15 | Aref | PWM | enable | autoreset | SANGUINO.CC | ICSP | GPLV2 | Thanks to: The Arduino Team, Ladyada, NYC Resistor | PWM | PWM | PWM | 8 | 9 | RX2 | TX2 | 0 | 1 | 2 | 3 | 4 | 5 | 6 | 7 | Reset | GND | Rx | Tx | 10 | 11 | 12 | 13 | 14 | JTAG | C3 | PWM | PWM | MOSI | MISO | SCK | PWM | PWM | PWM | GRN | Designed by: Zach & Adrian | BLK | http://reprap.org | RepRap | Generation3 | Electronics